# Altium PCB Copy of Main_Board.PcbDoc (part 3 of 4)
Units mil, origin at the board's own origin, x right, y up, seen from the top; angles counter-clockwise.
Board outline 5818.45 x 4760.12 mil, 4 copper layers (Top Layer, POWER, GROUND, Bottom Layer), stack 30.634 mil thick; 298 components, 323 nets, 1386 pads, 599 vias.
Unrouted connection lines stored in the file: 1.
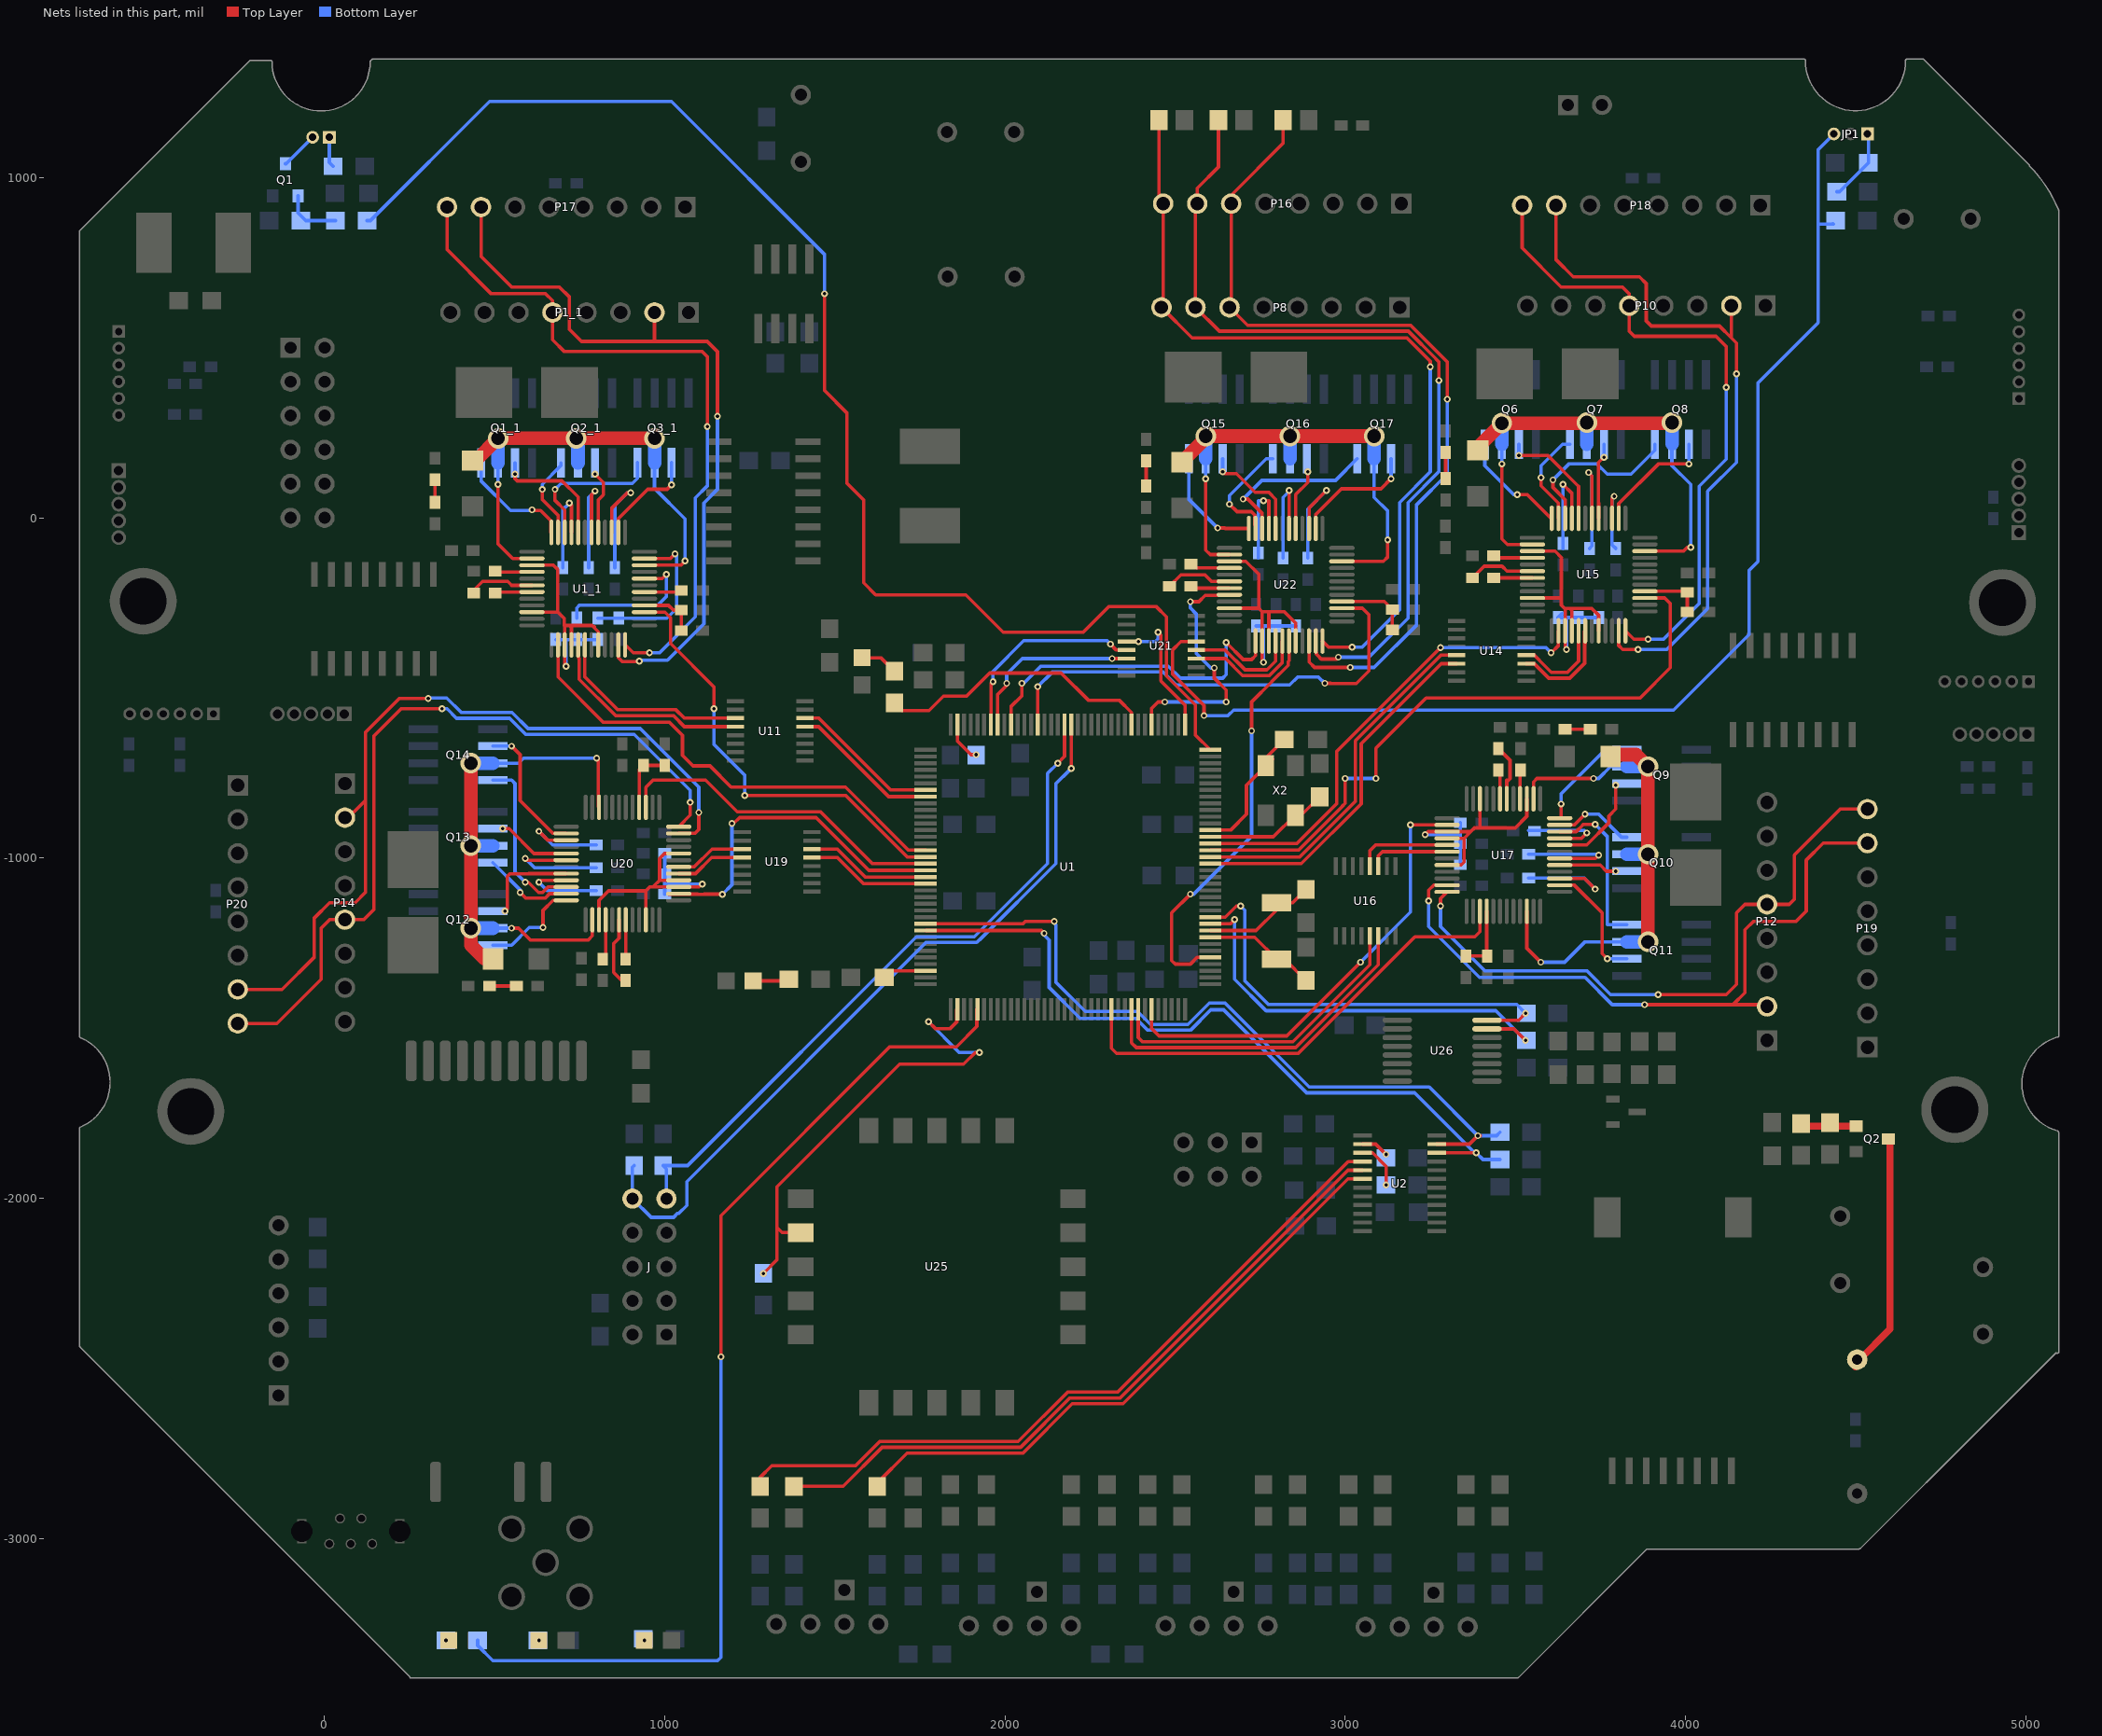
[diagram p5: the nets of this part, all layers, seen from the top]

## Via types
v1: diameter 20, hole 10, Top Layer to Bottom Layer, 507 vias
v2: diameter 25, hole 12, Top Layer to Bottom Layer, 48 vias
v3: diameter 60, hole 40, Top Layer to Bottom Layer, 40 vias
v4: diameter 30, hole 16, Top Layer to Bottom Layer, 3 vias
v5: diameter 32, hole 16, Top Layer to Bottom Layer, 1 vias

## Nets (pads, with @x,y where several pads share a name; then routed paths per layer and width w, separated by ;. In a path a pad name is that pad's centre, name@x,y a point inside that pad or via, vN(x,y) a via of type N, cw(c..) or ccw(c..) an arc to the next point about the centre after c; other vN are vias at no path point) (continued)
H1_d: P8.6 P16.6 R88.2 U22.10 | length 2564.1
  Top Layer w10: R88.2@2817.59,1168.62 2817.59,1101.22 2664.99,948.62 P16.6@2664.99,923.62 2664.99,613.62 2712.99,565.62 3192.58,565.62 3299.99,458.2 v1(3299.99,348.62) ; U22.10@2893.89,-362.13 2893.89,-423.78 2909.99,-439.88 v1(3014.99,-439.88)
  Bottom Layer w10: v1(3014.99,-439.88) 3084.99,-439.88 3209.99,-314.88 3209.99,38.62 3299.99,128.62 v1(3299.99,348.62)
H2_1: P1_1.2 P17.7 U1_1.11 | length 2255.5
  Top Layer w10: P17.7@459.99,913.62 459.99,768.62 549.99,678.62 689.99,678.62 719.99,648.62 719.99,553.62 754.99,518.62 974.99,518.62 ; U1_1.11@863.57,-373.63 863.57,-411.38 875.22,-423.03 923.35,-423.03 v1(924.99,-421.38) ; P1_1.2@969.99,603.62 969.99,523.62 974.99,518.62 ; v1(1154.99,298.62) 1154.99,488.62 1124.99,518.62 974.99,518.62
  Bottom Layer w10: v1(924.99,-421.38) 927.99,-418.38 1007.99,-418.38 1114.99,-311.38 1114.99,43.62 1154.99,83.62 v1(1154.99,298.62)
H2_2: P10.2 P18.7 U15.11 | length 2125.5
  Top Layer w10: P18.7@3619.99,918.62 3619.99,758.62 3669.99,708.62 3864.99,708.62 3884.99,688.62 3884.99,578.62 3899.99,563.62 4099.99,563.62 4134.99,528.62 ; U15.11@3804.05,-332.21 3804.05,-375.44 3815.46,-386.85 v1(3860.46,-386.85) ; P10.2@4134.99,623.62 4134.99,528.62 ; v1(4149.99,423.62) 4149.99,513.62 4134.99,528.62
  Bottom Layer w10: v1(3860.46,-386.85) 3945.46,-386.85 4065.46,-266.85 4065.46,78.15 4149.99,162.67 v1(4149.99,423.62)
H2_3: P12.2 P19.7 U17.11 | length 2047.6
  Top Layer w10: v1(3244.99,-1126.38) 3244.99,-1094.97 3259.99,-1079.97 U17.11@3299.64,-1079.97 ; v1(3879.99,-1431.38) 4139.99,-1431.38 ; P12.2@4239.99,-1436.38 4234.99,-1431.38 4139.99,-1431.38 ; P19.7@4534.99,-956.38 4404.99,-956.38 4354.99,-1006.38 4354.99,-1156.38 4324.99,-1186.38 4199.99,-1186.38 4174.99,-1211.38 4174.99,-1396.38 4139.99,-1431.38
  Bottom Layer w10: v1(3244.99,-1126.38) 3244.99,-1201.38 3394.99,-1351.38 3704.99,-1351.38 3784.99,-1431.38 v1(3879.99,-1431.38)
H2_4: P14.2 P20.7 U20.11 | length 2430.6
  Top Layer w10: P20.7@-255.01,-1386.38 -125.01,-1386.38 -30.01,-1291.38 -30.01,-1176.38 14.99,-1131.38 89.99,-1131.38 119.99,-1101.38 119.99,-831.38 ; P14.2@59.99,-881.38 69.99,-871.38 79.99,-871.38 119.99,-831.38 ; v1(304.99,-531.38) 219.99,-531.38 119.99,-631.38 119.99,-831.38 ; U20.11@1040.98,-927.8 1088.57,-927.8 1099.99,-916.38 v1(1099.99,-866.38)
  Bottom Layer w10: v1(304.99,-531.38) 306.99,-529.38 359.1,-529.38 402.1,-572.38 551.15,-572.38 598.15,-619.38 927.99,-619.38 1099.99,-791.38 v1(1099.99,-866.38)
H2_d: P8.7 P16.7 R87.2 U22.11 | length 2515.3
  Top Layer w10: R87.2@2627.59,1168.62 2627.59,1031.22 2564.99,968.62 P16.7@2564.99,923.62 2559.99,918.62 P8.7@2559.99,618.62 2629.99,548.62 3185.53,548.62 3266.99,467.16 3266.99,466.62 3274.99,458.62 v1(3274.99,403.62) ; U22.11@2913.57,-362.13 2913.57,-394.88 2915.35,-396.66 2915.35,-401.04 2920.68,-406.36 2929.47,-415.15 2974.72,-415.15 v1(2979.99,-409.88)
  Bottom Layer w10: v1(2979.99,-409.88) 3069.99,-409.88 3184.99,-294.88 3184.99,45.12 3274.99,135.12 v1(3274.99,403.62)
H3_1: P1_1.5 P17.8 U1_1.12 | length 2127
  Top Layer w10: P17.8@359.99,913.62 359.99,788.62 489.99,658.62 649.99,658.62 669.99,638.62 P1_1.5@669.99,603.62 669.99,523.62 704.99,488.62 1109.99,488.62 1124.99,473.62 v1(1124.99,268.62) ; U1_1.12@883.26,-373.63 884.4,-373.63 907.16,-396.38 v1(954.99,-396.38)
  Bottom Layer w10: v1(954.99,-396.38) 984.99,-396.38 1089.99,-291.38 1089.99,58.62 1124.99,93.62 v1(1124.99,268.62)
H3_2: P10.5 P18.8 U15.12 | length 1968.4
  Top Layer w10: P18.8@3519.99,918.62 3519.99,793.62 3634.99,678.62 3814.99,678.62 3834.99,658.62 P10.5@3834.99,623.62 3834.99,548.62 3849.99,533.62 4089.99,533.62 4119.99,503.62 v1(4119.99,383.62) ; U15.12@3823.73,-332.21 3824.09,-332.21 3848.73,-356.85 v1(3890.46,-356.85)
  Bottom Layer w10: v1(3890.46,-356.85) 3935.46,-356.85 4040.46,-251.85 4040.46,93.15 4119.99,172.67 v1(4119.99,383.62)
H3_3: P12.5 P19.8 U17.12 | length 1872.6
  Top Layer w10: v1(3279.99,-1141.38) 3279.99,-1119.3 U17.12@3299.64,-1099.65 ; v1(3919.99,-1401.38) 4119.99,-1401.38 4149.99,-1371.38 4149.99,-1161.38 4174.99,-1136.38 P12.5@4239.99,-1136.38 4304.99,-1136.38 4319.99,-1121.38 4319.99,-991.38 4454.99,-856.38 P19.8@4534.99,-856.38
  Bottom Layer w10: v1(3279.99,-1141.38) 3279.99,-1201.38 3409.99,-1331.38 3709.99,-1331.38 3779.99,-1401.38 v1(3919.99,-1401.38)
H3_4: P14.5 P20.8 U20.12 | length 2320
  Top Layer w10: P20.8@-255.01,-1486.38 -140.01,-1486.38 -10.01,-1356.38 -10.01,-1206.38 14.99,-1181.38 P14.5@59.99,-1181.38 114.99,-1181.38 144.99,-1151.38 144.99,-641.38 224.99,-561.38 v1(344.99,-561.38) ; U20.12@1040.98,-908.11 1074.99,-874.1 v1(1074.99,-836.38)
  Bottom Layer w10: v1(344.99,-561.38) 359.99,-561.38 387.99,-589.38 544.1,-589.38 591.1,-636.38 909.99,-636.38 1074.99,-801.38 v1(1074.99,-836.38)
H3_d: P8.8 P16.8 R86.2 U22.12 | length 2460.4
  Top Layer w10: R86.2@2452.59,1168.62 2452.59,936.02 P16.8@2464.99,923.62 2464.99,623.62 P8.8@2459.99,618.62 2549.99,528.62 3181.49,528.62 3249.99,460.12 v1(3249.99,443.62) ; U22.12@2933.26,-362.13 2949.99,-378.86 2949.99,-379.88 v1(3019.99,-379.88)
  Bottom Layer w10: v1(3019.99,-379.88) 3049.99,-379.88 3159.99,-269.88 3159.99,45.12 3249.99,135.12 v1(3249.99,443.62)
HEART: R34.1 U1.113 | length 3086.6
  Top Layer w10: v1(1164.99,-2466.38) 1164.99,-2051.38 1660.99,-1555.38 1857.29,-1555.38 1917.46,-1495.21 1917.46,-1444.69 U1.113@1919.24,-1444.69
  Bottom Layer w10: R34.1@449.99,-3300.08 449.99,-3315.08 494.99,-3360.08 1154.99,-3360.08 1164.99,-3350.08 v1(1164.99,-2466.38)
I2C_SCL_2: R49.1 U1.11 U26.16 | length 1313.9
  Top Layer w10: U1.11@2603.3,-1174.02 2647.35,-1174.02 2679.99,-1141.38 v1(2692.63,-1141.38) ; U26.16@3416.88,-1476.82 3509.56,-1476.82 v1(3529.99,-1456.38)
  Bottom Layer w10: v1(2692.63,-1141.38) 2704.99,-1153.74 2704.99,-1361.38 2773.99,-1430.38 3503.99,-1430.38 v1(3529.99,-1456.38)
I2C_SCL_3: R41.1 U1.100 U2.22 | length 2224.4
  Top Layer w10: U1.100@1766.68,-1213.39 2106.54,-1213.39 2114.54,-1221.38 v1(2114.99,-1221.38) ; U2.22@3268.99,-1866.82 3269.43,-1866.38 v1(3384.99,-1866.38)
  Bottom Layer w10: v1(2114.99,-1221.38) 2109.99,-1221.38 2129.99,-1241.38 2129.99,-1380.42 2220.95,-1471.38 2384.99,-1471.38 2419.99,-1506.38 2544.99,-1506.38 2604.99,-1446.38 2642.87,-1446.38 2886.87,-1690.38 3203.99,-1690.38 3379.99,-1866.38 v1(3384.99,-1866.38) 3404.99,-1886.38 R41.1@3454.99,-1886.38
I2C_SCL_4: J.10 R91.1 U1.54 | length 2258.6
  Top Layer w10: v1(2194.83,-736.54) U1.54@2194.83,-608.08
  Bottom Layer w10: R91.1@909.99,-1904.38 904.99,-1909.38 J.10@904.99,-2001.38 959.99,-2056.38 1025.95,-2056.38 1037.95,-2044.38 1041.99,-2044.38 1064.99,-2021.38 1064.99,-1951.38 1767.99,-1248.38 1917.03,-1248.38 1926.24,-1239.17 1926.99,-1239.17 2149.99,-1016.17 2149.99,-781.38 v1@2189.99,-741.38
I2C_SDA_2: R48.1 U1.10 U26.15 | length 1308.5
  Top Layer w10: U1.10@2603.3,-1193.7 2662.67,-1193.7 v1(2674.99,-1181.38) ; U26.15@3416.88,-1502.41 3496.02,-1502.41 v1(3529.99,-1536.38)
  Bottom Layer w10: v1(2674.99,-1181.38) 2674.99,-1356.38 2767.67,-1449.06 3442.67,-1449.06 v1(3529.99,-1536.38)
I2C_SDA_3: R40.1 U1.99 U2.23 | length 2255.9
  Top Layer w10: U1.99@1766.68,-1193.7 2052.67,-1193.7 2059.99,-1186.38 v1(2144.99,-1186.38) ; U2.23@3268.99,-1841.22 3365.15,-1841.22 v1(3389.99,-1816.38) v1@3396.99,-1816.38
  Bottom Layer w10: v1(2144.99,-1186.38) 2139.99,-1186.38 2149.99,-1196.38 2149.99,-1365.42 2235.95,-1451.38 2389.99,-1451.38 2427.99,-1489.38 2537.95,-1489.38 2600.95,-1426.38 2646.91,-1426.38 2893.91,-1673.38 3246.99,-1673.38 v1(3389.99,-1816.38) 3444.99,-1816.38 R40.1@3454.99,-1806.38
I2C_SDA_4: J.9 R92.2 U1.55 | length 2028
  Top Layer w10: v1(2154.99,-721.38) 2175.15,-701.22 U1.55@2175.15,-608.08
  Bottom Layer w10: J.9@1004.99,-2001.38 1004.99,-1914.38 R92.2@994.99,-1904.38 1066.99,-1904.38 1739.99,-1231.38 1909.99,-1231.38 2124.99,-1016.38 2124.99,-751.38 v1(2154.99,-721.38)
IMU_NRST: R119.1 U1.110 U25.2 | length 1431.5
  Top Layer w10: v1(1289.99,-2221.38) 1329.99,-2181.38 1329.99,-2086.38 ; U25.2@1399.99,-2101.38 1344.99,-2101.38 1329.99,-2086.38 ; v1(1774.99,-1481.38) 1794.99,-1501.38 1839.17,-1501.38 1858.41,-1482.14 1858.41,-1446.47 U1.110@1860.19,-1444.69 ; v1(1924.99,-1571.38) 1913.42,-1571.38 1878.42,-1606.38 1689.99,-1606.38 1329.99,-1966.38 1329.99,-2086.38
  Bottom Layer w10: v1(1774.99,-1481.38) 1864.99,-1571.38 v1(1924.99,-1571.38)
Infra: R2.1 U1.36 | length 4126.2
  Top Layer w10: v1(1469.99,658.62) 1469.99,373.62 1534.99,308.62 1534.99,102.66 1584.99,52.66 1584.99,-191.38 1619.99,-226.38 1884.99,-226.38 1994.99,-336.38 2229.99,-336.38 2304.99,-261.38 2444.99,-261.38 2474.99,-291.38 2474.99,-465.42 2559.99,-550.42 2559.99,-638.59 U1.36@2603.3,-681.89
  Bottom Layer w10: R2.1@124.99,873.62 134.99,873.62 484.99,1223.62 1019.99,1223.62 1469.99,773.62 v1(1469.99,658.62)
Infra_IN: JP1.3 R1.2 U21.5 | length 3634.7
  Top Layer w10: U21.5@2562.49,-363.88 2517.49,-363.88 2491.99,-389.38 2491.99,-458.38 2584.99,-551.38 v1(2584.99,-581.38)
  Bottom Layer w10: v1(2584.99,-581.38) 2655.95,-581.38 2671.95,-565.38 3965.03,-565.38 4186.99,-343.42 4186.99,-154.38 4212.99,-128.38 4212.99,396.62 4389.99,573.62 4389.99,863.62 ; R1.2@4433.49,865.12 4434.99,863.62 4389.99,863.62 ; JP1.3@4436.57,1128.62 4389.99,1082.04 4389.99,863.62
Infra_IN_V: U1.37 U21.12 | length 422.9
  Top Layer w10: U21.12@2357.49,-363.88 v1(2392.49,-363.88) v1@2394.37,-365.76 ; v1(2449.99,-336.38) 2457.99,-344.38 2457.99,-479.38 2529.48,-550.87 U1.37@2529.48,-608.08
  Bottom Layer w10: v1(2392.49,-363.88) 2442.49,-363.88 2449.99,-356.38 v1(2449.99,-336.38)
Infra_LED: R90.1 U1.45 | length 835.4
  Top Layer w10: R90.1@1674.99,-544.38 1696.99,-566.38 1776.91,-566.38 1818.91,-524.38 1886.99,-524.38 1954.99,-456.38 2164.99,-456.38 2244.72,-536.11 2335.71,-536.11 2372,-572.4 U1.45@2372,-608.08
IR+: JP2.1 R5.1 | length 89.5
  Bottom Layer w10: JP2.1@14.2,1118.62 14.2,1044.41 R5.1@24.99,1033.62
IR-: JP2.2 Q1.3 | length 112.2
  Bottom Layer w10: Q1.3@-115.01,1040.86 -112.76,1040.86 JP2.2@-35.01,1118.62
Motor_DIRO_d: U1.42 U22.44 | length 741.9
  Top Layer w10: U1.42@2431.06,-608.08 2431.06,-560.32 2449.99,-541.38 v1(2469.99,-541.38) ; v1(2544.99,-246.38) 2569.99,-246.38 2588.3,-228.08 2657.86,-228.08 U22.44@2659.64,-226.3 ; v1(2614.99,-441.38) 2614.99,-471.38 2649.99,-506.38 v1(2649.99,-541.38)
  Bottom Layer w10: v1(2469.99,-541.38) v1(2649.99,-541.38) ; v1(2544.99,-246.38) 2544.99,-265.27 2561.99,-282.27 2561.99,-398.38 2604.99,-441.38 v1(2614.99,-441.38)
Motor_FF1_1: U1_1.6 U11.3 | length 586.5
  Top Layer w10: U1_1.6@765.15,-373.63 765.15,-467.5 862.03,-564.38 1032.99,-564.38 1057.49,-588.88 U11.3@1207.49,-588.88
Motor_FF1_1_V: U1.79 U11.14 | length 441.6
  Top Layer w10: U11.14@1412.49,-588.88 1452.49,-588.88 1663.61,-800 U1.79@1766.68,-800
Motor_FF1_2: U14.3 U15.6 | length 340.3
  Top Layer w10: U14.3@3532.49,-428.88 3555.96,-428.88 3598.46,-471.38 3659.99,-471.38 3703.84,-427.53 3703.84,-333.99 U15.6@3705.62,-332.21 U15.6@3705.62,-369.34
Motor_FF1_2_V: U1.19 U14.14 | length 1070.9
  Top Layer w10: U1.19@2603.3,-1016.54 2871.08,-1016.54 3046.99,-840.63 3046.99,-664.38 3282.49,-428.88 U14.14@3327.49,-428.88
Motor_FF1_3: U16.3 U17.6 | length 237.3
  Top Layer w10: U16.3@3097.49,-1023.88 3097.49,-993.88 3109.83,-981.54 U17.6@3299.64,-981.54
Motor_FF1_3_V: U1.136 U16.14 | length 1015.8
  Top Layer w10: U1.136@2372,-1444.69 2372,-1543.39 2385.99,-1557.38 2588.19,-1557.38 2588.4,-1557.17 2854.2,-1557.17 3097.49,-1313.88 U16.14@3097.49,-1228.88
Motor_FF1_4: U19.3 U20.6 | length 213.3
  Top Layer w10: U20.6@1040.98,-1026.22 1086.26,-1026.22 1138.9,-973.59 1212.77,-973.59 U19.3@1232.45,-973.59
Motor_FF1_4_V: U1.92 U19.14 | length 368.2
  Top Layer w10: U19.14@1432.49,-973.88 1507.49,-973.88 1589.52,-1055.91 U1.92@1766.68,-1055.91
Motor_FF1_d: U21.3 U22.6 | length 353.2
  Top Layer w10: U21.3@2562.49,-413.88 2648.45,-413.88 2698.45,-463.88 2777.01,-463.88 2814.51,-426.38 2815.15,-426.38 U22.6@2815.15,-362.13
Motor_FF1_d_V: U1.65 U21.14 | length 530.9
  Top Layer w10: U1.65@1978.3,-608.08 1978.3,-519.36 2004.99,-492.67 v1(2004.99,-486.38) ; v1(2314.99,-413.88) U21.14@2357.49,-413.88
  Bottom Layer w10: v1(2004.99,-486.38) 2004.99,-459.69 2050.8,-413.88 v1(2314.99,-413.88)
Motor_FF2_1: U1_1.5 U11.4 | length 619.1
  Top Layer w10: U1_1.5@745.46,-373.63 747.24,-375.41 747.24,-412.54 748.15,-413.44 748.15,-474.54 854.99,-581.38 1024.99,-581.38 1057.49,-613.88 U11.4@1207.49,-613.88
Motor_FF2_1_V: U1.80 U11.13 | length 439.4
  Top Layer w10: U11.13@1412.49,-613.88 1452.49,-613.88 1658.3,-819.69 U1.80@1766.68,-819.69
Motor_FF2_2: U14.4 U15.5 | length 277.8
  Top Layer w10: U14.4@3532.49,-403.88 3555.96,-403.88 3569.99,-417.91 3569.99,-418.87 3605.5,-454.38 3652.95,-454.38 3685.94,-421.4 U15.5@3685.94,-332.21
Motor_FF2_2_V: U1.20 U14.13 | length 1074.2
  Top Layer w10: U1.20@2603.3,-996.85 2866.72,-996.85 3029.99,-833.59 3029.99,-655.42 3281.53,-403.88 U14.13@3327.49,-403.88
Motor_FF2_3: U16.4 U17.5 | length 279.2
  Top Layer w10: U16.4@3072.49,-1023.88 3072.49,-978.88 3089.52,-961.85 U17.5@3299.64,-961.85
Motor_FF2_3_V: U1.137 U16.13 | length 947.9
  Top Layer w10: U1.137@2391.68,-1444.69 2391.68,-1528.08 2403.78,-1540.17 2846.2,-1540.17 3072.49,-1313.88 U16.13@3072.49,-1228.88
Motor_FF2_4: U19.4 U20.5 | length 211
  Top Layer w10: U20.5@1040.98,-1045.91 1090.62,-1045.91 1137.74,-998.78 1212.77,-998.78 U19.4@1232.45,-998.78
Motor_FF2_4_V: U1.93 U19.13 | length 366
  Top Layer w10: U19.13@1432.49,-998.88 1507.49,-998.88 1584.2,-1075.59 U1.93@1766.68,-1075.59
Motor_FF2_d: U21.4 U22.5 | length 326.8
  Top Layer w10: U21.4@2562.49,-388.88 2647.49,-388.88 2705.49,-446.88 2769.1,-446.88 2769.6,-446.38 2770.46,-446.38 2795.46,-421.38 U22.5@2795.46,-362.13
Motor_FF2_d_V: U1.66 U21.13 | length 600.5
  Top Layer w10: U1.66@1958.61,-608.08 1958.61,-487.76 v1(1964.99,-481.38) ; v1(2309.99,-371.38) 2327.49,-388.88 U21.13@2357.49,-388.88
  Bottom Layer w10: v1(1964.99,-481.38) 1964.99,-451.38 2054.99,-361.38 2299.99,-361.38 v1(2309.99,-371.38)
Motor_MODE_1: U1.89 U1_1.15 | length 1302.8
  Top Layer w10: U1_1.15@940.35,-277.17 1000.31,-277.17 ; 999.99,-277.48 1000.31,-277.48 1016.99,-294.17 1016.99,-369.34 1144.99,-497.34 v1(1144.99,-561.38) ; v1(1234.99,-816.38) 1531.91,-816.38 1712.38,-996.85 U1.89@1766.68,-996.85
  Bottom Layer w10: v1(1144.99,-561.38) 1144.99,-666.38 1234.99,-756.38 v1(1234.99,-816.38)
Motor_MODE_2: U1.21 U15.15 | length 1939.5
  Top Layer w10: U1.21@2603.3,-977.17 2862.37,-977.17 2991.99,-847.54 2991.99,-847.26 2999.99,-839.26 v1(2999.99,-766.38) ; v1(3089.99,-766.38) 3089.99,-677.34 3237.95,-529.38 3866.99,-529.38 3955.46,-440.91 3955.46,-251.85 3939.68,-236.07 3939.36,-236.07 ; U15.15@3880.82,-235.75 3939.36,-235.75
  Bottom Layer w10: v1(2999.99,-766.38) v1(3089.99,-766.38)
Motor_MODE_3: U1.133 U17.15 | length 1412
  Top Layer w10: U1.133@2312.94,-1444.69 2312.94,-1559.33 2327.99,-1574.38 2595.23,-1574.38 2595.44,-1574.17 2862.2,-1574.17 3204.99,-1231.38 3381.09,-1231.38 3396.09,-1216.38 U17.15@3396.09,-1156.74
Motor_MODE_4: U1.90 U20.15 | length 991
  Top Layer w10: U20.15@944.52,-851.03 944.52,-792.48 965.62,-771.38 1119.99,-771.38 1212.99,-864.38 1457.99,-864.38 1610.15,-1016.54 U1.90@1766.68,-1016.54
Motor_MODE_d: U1.59 U22.15 | length 1403.9
  Top Layer w10: U1.59@2096.41,-608.08 v1(2096.41,-496.38) ; v1(2939.99,-486.38) 2956.49,-486.38 2956.99,-486.88 3032.99,-486.88 3069.99,-449.88 3069.99,-284.88 3050.78,-265.67 U22.15@2990.35,-265.67
  Bottom Layer w10: v1(2096.41,-496.38) 2139.41,-453.38 2464.99,-453.38 2502.99,-491.38 2836.99,-491.38 2859.99,-468.38 2921.99,-468.38 v1(2939.99,-486.38)
Motor_Reset_1: U1.88 U1_1.2 | length 1420
  Top Layer w10: U1_1.2@686.41,-373.63 686.41,-467.8 819.99,-601.38 1014.03,-601.38 1051.99,-639.34 1051.99,-698.38 1082.99,-729.38 1132.99,-729.38 1194.99,-791.38 1530.95,-791.38 1716.74,-977.17 U1.88@1766.68,-977.17
Motor_Reset_2: U1.22 U15.2 | length 1410.3
  Top Layer w10: U1.22@2603.3,-957.48 2858.01,-957.48 2974.99,-840.5 2974.99,-686.38 v1(3279.99,-381.38) ; v1@3605.46,-396.85 3626.88,-375.44 U15.2@3626.88,-332.21
  Bottom Layer w10: v1(3279.99,-381.38) 3589.99,-381.38 v1(3604.99,-396.38)
Motor_Reset_3: U1.139 U17.2 | length 1342.4
  Top Layer w10: U1.139@2431.06,-1444.69 2431.06,-1501.38 2452.84,-1523.17 2828.2,-1523.17 v1(3044.99,-1306.38) ; v1(3191.41,-902.8) U17.2@3299.64,-902.8
  Bottom Layer w10: v1(3044.99,-1306.38) 3191.99,-1159.38 3191.99,-903.38 v1(3191.41,-902.8)
Motor_Reset_4: U1.91 U20.2 | length 1020.6
  Top Layer w10: U20.2@1010.98,-1104.97 1012.39,-1106.38 1096.08,-1106.38 1096.98,-1107.28 1115.21,-1107.28 1116.1,-1106.38 1168.2,-1106.38 v1(1169.09,-1107.28) ; v1(1197.49,-898.88) 1202.49,-898.88 1219.99,-881.38 1444.99,-881.38 1599.83,-1036.22 U1.91@1766.68,-1036.22
  Bottom Layer w10: v1(1169.09,-1107.28) 1197.49,-1078.88 v1(1197.49,-898.88)
Motor_Reset_d: U1.63 U22.2 | length 1034.1
  Top Layer w10: U1.63@2017.67,-608.08 2017.67,-554.82 2049.99,-522.49 v1(2049.99,-486.38) ; v1(2649.99,-366.38) 2699.99,-416.38 2724.99,-416.38 2736.41,-404.97 U22.2@2736.41,-362.13 U22.2@2736.41,-352.13
  Bottom Layer w10: v1(2049.99,-486.38) 2054.99,-486.38 2104.99,-436.38 2479.99,-436.38 2514.99,-471.38 2639.99,-471.38 2649.99,-461.38 v1(2649.99,-366.38)
Motor_TACHO_d: U1.5 U22.7 | length 1218.7
  Top Layer w10: v1(2544.99,-1106.38) 2489.99,-1161.38 2489.99,-1301.38 2500.42,-1311.82 2544.99,-1311.82 2564.68,-1292.13 U1.5@2603.3,-1292.13 ; v1(2724.99,-626.38) 2724.99,-541.38 2784.69,-481.68 2784.69,-480.88 2832.15,-433.42 2832.15,-422.41 2834.83,-419.72 U22.7@2834.83,-362.13
  Bottom Layer w10: v1(2544.99,-1106.38) 2554.99,-1106.38 2724.99,-936.38 v1(2724.99,-626.38) v1@2724.99,-621.38
NetC1_1: C1.1 JP1.1 R4.1 | length 214.5
  Bottom Layer w10: R4.1@4444.99,958.62 4452.99,958.62 C1.1@4537.99,1043.62 4537.99,1125.62 JP1.1@4534.99,1128.62
NetC1_1_2: C1_1.2 U1_1.40 | length 109.3
  Top Layer w10: C1_1.2@501.49,-156.38 504.17,-159.06 U1_1.40@609.64,-159.06
NetC2_1_2: C2_1.2 R2_1.2 R4_1.2 U1_1.3 U1_1.4 U1_1.8 U1_1.39 U1_1.46 | length 863.1
  Top Layer w10: U1_1.46@609.64,-277.17 685.78,-277.17 ; U1_1.39@609.64,-139.37 672.98,-139.37 685.78,-152.17 685.78,-277.17 ; v1(709.99,-436.38) 706.09,-432.48 U1_1.3@706.09,-373.63 706.09,-317.48 704.99,-316.38 ; U1_1.4@725.78,-373.63 725.78,-322.17 719.99,-316.38 ; 793.49,-319.88 789.69,-319.88 ; U1_1.8@804.52,-373.63 804.52,-334.72 789.69,-319.88 ; 685.78,-277.17 704.99,-296.38 704.99,-316.38 ; 704.99,-316.38 719.99,-316.38 ; 719.99,-316.38 786.19,-316.38 789.69,-319.88
  Bottom Layer w10: C2_1.2@679.99,-357.88 709.99,-357.88 ; v1(709.99,-436.38) 709.99,-357.88 ; R4_1.2@803.33,-357.88 R2_1.2@741.66,-357.88 709.99,-357.88
NetC3_1_2: C3_1.2 R1_1.2 U1_1.16 | length 173.9
  Top Layer w10: U1_1.16@940.35,-257.48 1011.09,-257.48 1024.99,-271.38 R1_1.2@1048.49,-271.38 C3_1.2@1048.49,-331.38
NetC5_1_1: C5_1.1 U1_1.43 | length 109.5
  Top Layer w10: C5_1.1@501.49,-221.38 504.76,-218.11 U1_1.43@609.64,-218.11
NetC5_1_2: C5_1.2 U1_1.42 | length 195.1
  Top Layer w10: C5_1.2@438.49,-221.38 438.49,-212.88 464.49,-186.88 538.44,-186.88 549.68,-198.11 549.99,-198.11 ; 549.99,-198.43 U1_1.42@609.64,-198.43
NetC6_1_2: C6_1.2 U1_1.33 | length 287.6
  Top Layer w10: v1(719.99,43.62) 725.78,37.83 U1_1.33@725.78,-42.92
  Bottom Layer w10: C6_1.2@699.99,-146.77 699.99,23.62 v1(719.99,43.62)
NetC7_1_2: C7_1.2 U1_1.30 | length 358.8
  Top Layer w10: U1_1.30@784.83,-42.92 784.83,68.46 v1(794.99,78.62)
  Bottom Layer w10: C7_1.2@776.57,-146.77 776.57,60.2 v1(794.99,78.62)
NetC8_1_2: C8_1.2 U1_1.27 | length 391.3
  Top Layer w10: U1_1.27@843.89,-42.92 843.89,27.52 889.99,73.62 v1(899.99,73.62)
  Bottom Layer w10: C8_1.2@853.15,-146.77 853.15,36.78 889.99,73.62 v1(899.99,73.62)
NetC11_2: C11.2 U1.106 | length 131.7
  Top Layer w10: C11.2@1634.99,-1331.5 U1.106@1766.68,-1331.5
NetC12_2: C12.2 U1.71 | length 119.8
  Top Layer w10: U1.71@1860.19,-608.08 1860.19,-656.58 1899.99,-696.38 v1(1914.99,-696.38)
NetC46_2: C46.2 U15.40 | length 115.5
  Top Layer w10: C46.2@3436.96,-111.85 3442.75,-117.64 U15.40@3550.11,-117.64
NetC47_2: C47.2 R63.2 R65.2 U15.3 U15.4 U15.8 U15.39 U15.46 | length 914.2
  Top Layer w10: U15.46@3550.11,-235.75 3635.46,-235.75 ; U15.39@3550.11,-97.96 3616.57,-97.96 3635.46,-116.85 3635.46,-235.75 ; v1(3650.46,-386.85) 3646.57,-382.96 U15.3@3646.57,-332.21 3646.57,-267.96 3645.46,-266.85 ; U15.4@3666.25,-332.21 3666.25,-272.64 3660.46,-266.85 ; U15.8@3744.99,-332.21 3744.99,-286.38 3725.46,-266.85 3660.46,-266.85 ; 3635.46,-235.75 3635.46,-256.85 3645.46,-266.85 ; 3645.46,-266.85 3660.46,-266.85
  Bottom Layer w10: 3645.46,-281.85 3636.96,-281.85 C47.2@3625.46,-293.35 3650.46,-293.35 ; v1(3650.46,-386.85) 3650.46,-293.35 ; R65.2@3745.46,-293.35 R63.2@3685.46,-293.35 3650.46,-293.35
NetC48_2: C48.2 R62.2 U15.16 | length 183.5
  Top Layer w10: U15.16@3880.82,-216.07 4002.18,-216.07 R62.2@4005.46,-219.35 C48.2@4005.46,-276.85
NetC49_1: C49.1 U15.43 | length 113.2
  Top Layer w10: C49.1@3436.96,-176.85 3437.12,-176.7 U15.43@3550.11,-176.7
NetC49_2: C49.2 U15.42 | length 196.5
  Top Layer w10: C49.2@3373.96,-176.85 3408.46,-142.35 3460.96,-142.35 3475.62,-157.01 U15.42@3550.11,-157.01
NetC50_2: C50.2 U15.33 | length 298.5
  Top Layer w10: v1(3640.46,98.15) 3665.46,73.15 ; U15.33@3666.25,-1.5 3666.25,73.15
  Bottom Layer w10: C50.2@3640.46,-90.35 v1(3640.46,98.15)
NetC51_2: C51.2 U15.30 | length 355.3
  Top Layer w10: v1@3720.46,128.15 3725.31,123.3 U15.30@3725.31,-1.5
  Bottom Layer w10: C51.2@3717.96,-90.35 3725.46,-82.85 3725.46,123.15 v1@3720.46,128.15
  other v1: 3715.46,133.15
NetC52_2: C52.2 U15.27 | length 227.8
  Top Layer w10: U15.27@3784.36,-1.5 3784.36,57.04 v1(3790.46,63.15)
  Bottom Layer w10: v1(3790.46,63.15) 3784.36,57.04 3784.36,-79.25 C52.2@3795.46,-90.35
NetC58_2: C58.2 U17.40 | length 114.9
  Top Layer w10: C58.2@3509.99,-741.38 3514.2,-745.59 U17.40@3514.2,-854.53
NetC59_2: C59.2 R69.2 R71.2 U17.3 U17.4 U17.8 U17.39 U17.46 | length 885.5
  Top Layer w10: v1(3234.99,-931.38) 3243.89,-922.48 U17.3@3299.64,-922.48 3368.89,-922.48 ; U17.8@3299.64,-1020.91 3340.46,-1020.91 3349.2,-1012.17 3349.2,-942.17 ; U17.4@3299.64,-942.17 3349.2,-942.17 ; U17.46@3396.09,-826.03 3396.09,-911.38 ; U17.39@3533.89,-826.03 3533.89,-877.48 3499.99,-911.38 3396.09,-911.38 ; 3349.2,-942.17 3368.89,-922.48 ; 3368.89,-922.48 3379.99,-911.38 3396.09,-911.38
  Bottom Layer w10: v1(3234.99,-931.38) 3338.49,-931.38 ; R71.2@3338.49,-1019.72 R69.2@3338.49,-958.05 3338.49,-931.38 ; C59.2@3338.49,-896.38 3338.49,-931.38
NetC60_2: C60.2 R68.2 U17.16 | length 191.4
  Top Layer w10: R68.2@3354.99,-1288.38 3414.07,-1288.38 3415.78,-1286.67 U17.16@3415.78,-1156.74
NetC61_1: C61.1 U17.43 | length 117.4
  Top Layer w10: C61.1@3444.99,-741.38 3455.15,-751.54 U17.43@3455.15,-854.53
NetC61_2: C61.2 U17.42 | length 194.3
  Top Layer w10: C61.2@3449.99,-678.38 3484.49,-712.88 3484.49,-766.6 3475.15,-775.94 U17.42@3475.15,-800.04 ; U17.42@3474.83,-826.03 3474.83,-771.54
NetC62_2: C62.2 U17.33 | length 260.3
  Top Layer w10: U17.33@3630.35,-942.17 3694.2,-942.17 v1(3709.99,-926.38)
  Bottom Layer w10: C62.2@3538.99,-918.88 3702.49,-918.88 v1(3709.99,-926.38)
NetC63_2: C63.2 U17.30 | length 325.8
  Top Layer w10: U17.30@3630.35,-1001.22 3735.15,-1001.22 v1(3744.99,-991.38)
  Bottom Layer w10: C63.2@3538.99,-988.88 3742.49,-988.88 v1(3744.99,-991.38)
NetC64_2: C64.2 U17.27 | length 327
  Top Layer w10: U17.27@3630.35,-1060.28 3703.89,-1060.28 v1(3734.99,-1091.38)
  Bottom Layer w10: C64.2@3538.99,-1058.88 3702.49,-1058.88 v1(3734.99,-1091.38)
NetC70_2: C70.2 U20.40 | length 119.3
  Top Layer w10: C70.2@817.49,-1297.38 826.41,-1288.47 U20.40@826.41,-1181.74
NetC71_2: C71.2 R75.2 R77.2 U20.3 U20.4 U20.8 U20.39 U20.46 | length 905.3
  Top Layer w10: U20.39@806.72,-1181.74 806.72,-1124.65 834.52,-1096.85 944.52,-1096.85 ; U20.46@944.52,-1181.74 944.52,-1096.85 ; U20.4@1040.98,-1065.59 984.99,-1065.59 ; U20.8@1040.98,-986.85 999.52,-986.85 984.99,-1001.38 984.99,-1065.59 ; v1(1109.99,-1076.38) 1101.09,-1085.28 U20.3@1040.98,-1085.28 965.31,-1085.28 ; 944.52,-1096.85 956.09,-1085.28 965.31,-1085.28 ; 965.31,-1085.28 984.99,-1065.59
  Bottom Layer w10: C71.2@999.99,-1106.38 999.99,-1076.38 ; R77.2@999.99,-986.38 R75.2@999.99,-1046.38 999.99,-1076.38 ; v1(1109.99,-1076.38) 999.99,-1076.38
NetC72_2: C72.2 R74.2 U20.16 | length 190.9
  Top Layer w10: U20.16@924.83,-851.03 924.83,-740.54 R74.2@937.49,-727.88 C72.2@999.99,-727.88
NetC73_1: C73.1 U20.43 | length 115.8
  Top Layer w10: C73.1@884.99,-1297.38 885.46,-1296.91 U20.43@885.46,-1181.74
NetC73_2: C73.2 U20.42 | length 206.1
  Top Layer w10: U20.42@865.78,-1181.74 865.78,-1235.59 849.99,-1251.38 849.99,-1336.38 873.99,-1360.38 C73.2@884.99,-1360.38
NetC74_2: C74.2 U20.33 | length 261.5
  Top Layer w10: v1(629.99,-1071.38) 635.78,-1065.59 U20.33@710.27,-1065.59
  Bottom Layer w10: v1(629.99,-1071.38) 654.99,-1096.38 C74.2@798.49,-1096.38
NetC75_2: C75.2 U20.30 | length 342.3
  Top Layer w10: v1(589.99,-1001.38) 595.15,-1006.54 U20.30@710.27,-1006.54
  Bottom Layer w10: v1(589.99,-1001.38) 617.49,-1028.88 C75.2@798.49,-1028.88
NetC76_2: C76.2 U20.27 | length 276.2
  Top Layer w10: v1(629.99,-921.38) 656.09,-947.48 U20.27@710.27,-947.48
  Bottom Layer w10: v1(629.99,-921.38) 669.99,-961.38 C76.2@798.49,-961.38
NetC82_2: C82.2 U22.40 | length 113.4
  Top Layer w10: C82.2@2551.49,-134.88 2564.17,-147.56 U22.40@2659.64,-147.56
NetC83_2: C83.2 R81.2 R83.2 U22.3 U22.4 U22.8 U22.39 U22.46 | length 928.2
  Top Layer w10: U22.46@2659.64,-265.67 2745.78,-265.67 ; U22.39@2659.64,-127.87 2707.98,-127.87 2745.78,-165.67 2745.78,-265.67 ; v1(2759.99,-424.88) 2756.09,-420.98 U22.3@2756.09,-362.13 2756.09,-275.98 ; U22.4@2775.78,-362.13 2775.78,-276.77 2774.99,-275.98 ; U22.8@2854.52,-362.13 2854.52,-309.41 2821.09,-275.98 2774.99,-275.98 ; 2745.78,-265.67 2756.09,-275.98 ; 2756.09,-275.98 2774.99,-275.98
  Bottom Layer w10: C83.2@2738.33,-317.88 2759.99,-317.88 ; v1(2759.99,-424.88) 2759.99,-317.88 ; R83.2@2854.99,-317.88 R81.2@2796.66,-317.88 2759.99,-317.88
NetC84_2: C84.2 R80.2 U22.16 | length 218
  Top Layer w10: U22.16@2990.35,-245.98 3114.59,-245.98 R80.2@3138.49,-269.88 C84.2@3138.49,-329.88
NetC86_1: C86.1 U22.43 | length 125.4
  Top Layer w10: C86.1@2534.99,-204.88 2536.72,-206.61 U22.43@2659.64,-206.61
NetC86_2: C86.2 U22.42 | length 198.2
  Top Layer w10: C86.2@2483.49,-201.38 2517.31,-167.56 2587.67,-167.56 2607.04,-186.93 U22.42@2659.64,-186.93
NetC87_2: C87.2 U22.33 | length 280.2
  Top Layer w10: v1(2759.99,50.12) 2774.99,50.12 2775.46,49.65 2775.46,40.12 ; U22.33@2775.78,-31.42 2775.78,40.12
  Bottom Layer w10: C87.2@2744.99,-118.38 2744.99,50.12 v1(2759.99,50.12)
NetC88_2: C88.2 U22.30 | length 317.3
  Top Layer w10: U22.30@2834.83,-31.42 2834.99,-31.26 v1(2834.99,80.12)
  Bottom Layer w10: C88.2@2817.49,-118.38 2817.49,60.12 2834.99,77.62 v1(2834.99,80.12)
NetC89_2: C89.2 U22.27 | length 354
  Top Layer w10: U22.27@2893.89,-31.42 2893.89,29.02 v1(2944.99,80.12)
  Bottom Layer w10: C89.2@2889.99,-118.38 2889.99,25.12 v1(2944.99,80.12)
NetC95_1: C95.1 U1.8 X1.2 | length 334.4
  Top Layer w10: U1.8@2603.3,-1233.07 2734.01,-1233.07 X1.2@2798.07,-1297.14 2821.75,-1297.14 C95.1@2884.99,-1360.38
NetC96_1: C96.1 U1.9 X1.1 | length 344.4
  Top Layer w10: U1.9@2603.3,-1213.39 2737.98,-1213.39 2798.07,-1153.3 X1.1@2798.07,-1131.79 2845.59,-1131.79 C96.1@2884.99,-1092.38
NetC97_1: C97.1 U1.23 X2.1 | length 398.3
  Top Layer w10: U1.23@2603.3,-937.8 2788.57,-937.8 2852.73,-873.65 X2.1@2872.73,-853.65 ; X2.1@2853.3,-874.22 2871.16,-874.22 C97.1@2924.99,-820.38
NetC98_1: C98.1 U1.24 X2.3 | length 420
  Top Layer w10: U1.24@2603.3,-918.11 2663.26,-918.11 2709.99,-871.38 2709.99,-786.38 2767.26,-729.12 X2.3@2787.26,-709.12 ; X2.3@2766.68,-728.55 2766.68,-705.69 C98.1@2820.99,-651.38
NetDS1_2: DS1.2 R90.2 | length 111.6
  Top Layer w10: DS1.2@1579.99,-411.38 1634.99,-411.38 R90.2@1674.99,-451.38
NetDS2_2: DS2.2 R33.2
  other v1: 629.99,-3300.08
NetDS3_2: DS3.2 R34.2
  other v1: 356.99,-3300.08
NetDS4_2: DS4.2 R102.2 | length 107.1
  Top Layer w10: DS4.2@1259.99,-1361.38 1359.99,-1361.38 R102.2@1364.99,-1356.38
NetDS5_2: DS5.2 R124.2
  other v1: 939.99,-3300.08
NetLED1_2: LED1.2 R58.2 | length 67
  Top Layer w10: R58.2@324.99,45.12 LED1.2@324.99,112.12
NetLED2_2: LED2.2 R59.2 | length 77
  Top Layer w10: R59.2@3295.46,115.59 LED2.2@3295.46,192.59
NetLED3_2: LED3.2 R60.2 | length 73.5
  Top Layer w10: R60.2@3646.49,-621.38 LED3.2@3719.99,-621.38
NetLED4_2: LED4.2 R61.2 | length 78.5
  Top Layer w10: LED4.2@484.99,-1376.38 R61.2@563.49,-1376.38
NetLED5_2: LED5.2 R89.2 | length 73.5
  Top Layer w10: R89.2@2414.99,93.62 LED5.2@2414.99,167.12
NetLS1_2: LS1.2 Q2.3 | length 718.4
  Top Layer w20: LS1.2@4499.99,-2496.38 4499.99,-2476.38 4509.99,-2476.38 4601.31,-2385.07 Q2.3@4601.31,-1825.82
NetQ1_1: Q1.1 R2.2 R3.1 | length 169.1
  Bottom Layer w10: Q1.1@-77.61,946.37 -77.61,896.22 -55.01,873.62 R2.2@31.99,873.62
NetQ1_1_2: Q1_1.2 U1_1.32 | length 358.2
  Top Layer w10: v1(559.99,128.62) 559.99,115.51 566.88,108.62 697.79,108.62 745.46,61.26 U1_1.32@745.46,-42.92
  Bottom Layer w10: v1(559.99,128.62) Q1_1.2@559.99,161.73
NetQ1_1_3: Q1_1.3 Q2_1.3 Q3_1.3 R6_1.2 U1_1.22 U1_1.38 | length 1568.1
  Top Layer w10: v1(509.99,98.62) 509.99,-76.38 553.3,-119.69 U1_1.38@609.64,-119.69 ; U1_1.22@940.35,-139.37 1047,-139.37 v1(1059.99,-126.38)
  Top Layer w40: R6_1.2@434.99,168.26 444.64,168.26 v3(509.99,233.62) v3(739.99,233.62) v3(969.99,233.62)
  Bottom Layer w10: v1(509.99,98.62) Q1_1.3@509.99,161.73 ; Q3_1.3@969.99,162 969.99,86.73 1059.99,-3.27 v1(1059.99,-126.38)
  Bottom Layer w40: Q1_1.3@509.99,161.73 v3@509.99,223.62 ; Q2_1.3@744.99,161.73 v3@744.99,227.91 ; Q3_1.3@969.99,162 v3(969.99,233.62)
NetQ1_1_4: Q1_1.4 U1_1.36 | length 343
  Top Layer w10: v1(609.99,23.62) 611.88,21.73 634.99,21.73 665.5,-8.78 U1_1.36@665.5,-42.92
  Bottom Layer w10: Q1_1.4@459.99,161.73 459.99,108.62 546.88,21.73 608.1,21.73 v1(609.99,23.62)
NetQ2_1: Q2.1 R6.2 R7.1 | length 164.7
  Top Layer w20: R7.1@4339.99,-1781.38 4347.02,-1788.41 Q2.1@4501.82,-1788.41
NetQ2_1_2: Q2_1.2 U1_1.29 | length 188.3
  Top Layer w10: v1(794.99,128.62) 819.99,103.62 819.99,67.69 804.52,52.22 U1_1.29@804.52,-42.92
NetQ2_1_4: Q2_1.4 U1_1.35 | length 246.7
  Top Layer w10: v1(639.99,83.62) 639.99,53.62 644.99,48.62 686.41,7.2 U1_1.35@686.41,-42.92
  Bottom Layer w10: v1(639.99,83.62) 639.99,98.62 694.99,153.62 Q2_1.4@694.99,161.73
NetQ3_1_2: Q3_1.2 U1_1.26 | length 303
  Top Layer w10: U1_1.26@863.57,-42.92 863.57,-2.8 950.1,83.73 1006.99,83.73 v1(1019.99,96.73)
  Bottom Layer w10: v1(1019.99,96.73) Q3_1.2@1019.99,162
NetQ3_1_4: Q3_1.4 U1_1.34 | length 440.1
  Top Layer w10: v1(677.49,83.62) 677.49,51.12 706.09,22.52 U1_1.34@706.09,-42.92
  Bottom Layer w10: v1(677.49,83.62) 695.25,101.37 904.99,101.37 919.99,116.37 Q3_1.4@919.99,162
NetQ6_2: Q6.2 U15.32 | length 340.5
  Top Layer w10: v1(3510.46,183.15) 3595.46,183.15 3685.62,92.99 ; 3685.62,92.67 3685.62,92.99 ; U15.32@3685.94,-1.5 3685.94,92.67 3685.62,92.99
  Bottom Layer w10: v1(3510.46,183.15) Q6.2@3510.46,216.26
NetQ6_3: Q6.3 Q7.3 Q8.3 R67.2 U15.22 U15.38 | length 1637.1
  Top Layer w10: v1(3460.46,158.15) 3460.46,-61.85 3476.88,-78.27 U15.38@3550.11,-78.27 ; U15.22@3880.82,-97.96 3994.36,-97.96 4005.46,-86.85 v1(4015.46,-86.85)
  Top Layer w40: R67.2@3389.99,198.26 3389.99,207.67 v3(3460.46,278.15) 3958.57,278.15 v3(3960.46,280.03)
  Bottom Layer w10: v1(3460.46,158.15) Q6.3@3460.46,216.26 ; Q8.3@3960.46,216.26 3960.46,153.15 4015.46,98.15 v1(4015.46,-86.85)
  Bottom Layer w40: Q6.3@3460.46,216.26 v3(3460.46,278.15) ; Q7.3@3710.46,216.26 v3(3710.46,280.03) ; Q8.3@3960.46,218.15 v3(3960.46,280.03)
NetQ6_4: Q6.4 U15.36 | length 322.7
  Top Layer w10: v1(3505.46,68.15) 3535.46,68.15 3605.11,-1.5 U15.36@3605.98,-1.5
  Bottom Layer w10: Q6.4@3410.46,216.26 3410.46,153.15 3495.46,68.15 v1(3505.46,68.15)
NetQ7_2: Q7.2 U15.29 | length 224.3
  Top Layer w10: 3744.68,43.15 3744.68,162.36 v1(3760.46,178.15) ; U15.29@3744.99,-1.5 3744.99,43.15
  Bottom Layer w10: v1(3760.46,178.15) Q7.2@3760.46,216.26
NetQ7_4: Q7.4 U15.35 | length 287
  Top Layer w10: v1(3575.46,118.15) 3575.46,94.25 3626.57,43.15 ; U15.35@3626.88,-1.5 3626.88,43.15
  Bottom Layer w10: v1(3575.46,118.15) 3575.46,153.15 3638.57,216.26 Q7.4@3660.46,216.26
NetQ8_2: Q8.2 U15.26 | length 356
  Top Layer w10: U15.26@3804.05,-1.5 3804.05,41.73 3920.46,158.15 v1(4010.46,158.15)
  Bottom Layer w10: v1(4010.46,158.15) Q8.2@4010.46,216.26
NetQ8_4: Q8.4 U15.34 | length 506.8
  Top Layer w10: v1(3610.46,111.43) 3610.46,89.25 3646.57,53.15 U15.34@3646.57,-1.5
  Bottom Layer w10: v1(3610.46,111.43) 3657.18,158.15 3740.46,158.15 3770.46,128.15 3840.46,128.15 3910.46,198.15 Q8.4@3910.46,216.26
NetQ9_2: Q9.2 U17.32 | length 290.1
  Top Layer w10: U17.32@3630.35,-961.85 3699.52,-961.85 ; 3699.52,-961.54 3710.19,-961.54 3774.99,-896.74 3774.99,-876.38 3794.99,-856.38 v1(3794.99,-786.38)
NetQ9_3: Q9.3 Q10.3 Q11.3 R73.2 U17.22 U17.38 | length 1614.9
  Top Layer w10: U17.22@3533.89,-1156.74 3533.89,-1205.28 3533.89,-1265.28 v1(3574.99,-1306.38) ; U17.38@3553.57,-826.03 3553.57,-776.38 3563.57,-766.38 v1(3729.99,-766.38)
  Top Layer w40: R73.2@3779.99,-701.38 3784.99,-696.38 3854.99,-696.38 v3(3889.99,-731.38) v3(3889.99,-988.88) v3(3889.99,-1246.38)
  Bottom Layer w10: v1(3574.99,-1306.38) 3644.99,-1306.38 3704.99,-1246.38 Q11.3@3827.87,-1246.38 ; v1(3729.99,-766.38) 3744.99,-766.38 3779.99,-731.38 Q9.3@3827.87,-731.38
  Bottom Layer w40: Q11.3@3827.87,-1246.38 v3(3889.99,-1246.38) ; Q10.3@3827.87,-988.88 v3(3889.99,-988.88) ; Q9.3@3827.87,-731.38 v3(3889.99,-731.38)
NetQ9_4: Q9.4 U17.36 | length 320.4
  Top Layer w10: U17.36@3630.35,-883.11 3634.99,-878.47 v1(3634.99,-841.38)
  Bottom Layer w10: v1(3634.99,-841.38) 3634.99,-811.38 3764.99,-681.38 Q9.4@3827.87,-681.38
NetQ10_2: Q10.2 U17.29 | length 172.1
  Top Layer w10: U17.29@3630.35,-1020.91 3749.52,-1020.91 3767.49,-1038.88 v1(3794.99,-1038.88)
NetQ10_4: Q10.4 U17.35 | length 238.5
  Top Layer w10: U17.35@3630.35,-902.8 3673.57,-902.8 v1(3704.99,-871.38)
  Bottom Layer w10: v1(3704.99,-871.38) 3744.99,-871.38 3812.49,-938.88 Q10.4@3827.87,-938.88
NetQ11_2: Q11.2 U17.26 | length 362.5
  Top Layer w10: U17.26@3630.35,-1079.97 3673.57,-1079.97 3754.99,-1161.38 3754.99,-1281.38 v1(3769.99,-1296.38)
  Bottom Layer w10: v1@3764.99,-1296.38 v1(3769.99,-1296.38) Q11.2@3827.87,-1296.38
NetQ11_4: Q11.4 U17.34 | length 481.3
  Top Layer w10: U17.34@3630.35,-922.48 3678.89,-922.48 3697.49,-903.88 3697.49,-902.92 3699.03,-901.38 v1(3734.99,-901.38)
  Bottom Layer w10: v1(3734.99,-901.38) 3769.99,-936.38 3769.99,-1196.38 Q11.4@3827.87,-1196.38
NetQ12_2: Q12.2 U20.32 | length 281.6
  Top Layer w10: v1(529.99,-1156.38) 536.99,-1149.38 536.99,-1054.38 545.15,-1046.22 599.99,-1046.22 ; 599.99,-1045.91 U20.32@710.27,-1045.91
NetQ12_3: Q12.3 Q13.3 Q14.3 R79.2 U20.22 U20.38 | length 1629.7
  Top Layer w10: v1(549.99,-1206.38) 569.99,-1206.38 604.99,-1241.38 774.99,-1241.38 787.04,-1229.34 U20.38@787.04,-1181.74 ; v1(799.99,-706.38) 804.94,-711.33 804.94,-849.25 U20.22@806.72,-851.03
  Top Layer w40: v3(429.99,-721.38) v3(429.99,-963.88) v3(429.99,-1206.38) 429.99,-1256.38 469.99,-1296.38 R79.2@495.35,-1296.38
  Bottom Layer w10: Q12.3@494.99,-1206.38 v1(549.99,-1206.38) ; Q14.3@494.99,-721.38 569.99,-721.38 584.99,-706.38 v1(799.99,-706.38)
  Bottom Layer w40: v3(429.99,-1206.38) Q12.3@494.99,-1206.38 ; v3(429.99,-963.88) Q13.3@494.99,-963.88 ; v3(429.99,-721.38) Q14.3@494.99,-721.38
NetQ12_4: Q12.4 U20.36 | length 299.1
  Top Layer w10: v1(641.99,-1204.38) 641.99,-1154.38 671.72,-1124.65 U20.36@710.27,-1124.65
  Bottom Layer w10: Q12.4@494.99,-1256.38 549.99,-1256.38 601.99,-1204.38 v1(641.99,-1204.38)
NetQ13_2: Q13.2 U20.29 | length 216.8
  Top Layer w10: v1(523.74,-913.88) 542.49,-913.88 615.46,-986.85 U20.29@710.27,-986.85
NetQ13_4: Q13.4 U20.35 | length 268.5
  Top Layer w10: v1(574.99,-1101.38) 591.99,-1118.38 647.99,-1118.38 661.41,-1104.97 U20.35@710.27,-1104.97
  Bottom Layer w10: Q13.4@494.99,-1013.88 574.99,-1093.88 v1(574.99,-1101.38)
NetQ14_2: Q14.2 U20.26 | length 400.6
  Top Layer w10: v1(549.99,-671.38) 574.99,-696.38 574.99,-831.38 671.41,-927.8 U20.26@710.27,-927.8
  Bottom Layer w10: Q14.2@494.99,-671.38 v1(549.99,-671.38)
NetQ14_4: Q14.4 U20.34 | length 510.9
  Top Layer w10: v1(589.99,-1071.38) 598.88,-1071.38 620.88,-1093.38 621.03,-1093.38 629.03,-1101.38 640.95,-1101.38 657.05,-1085.28 U20.34@710.27,-1085.28
  Bottom Layer w10: Q14.4@494.99,-771.38 549.99,-771.38 559.99,-781.38 559.99,-1041.38 v1(589.99,-1071.38)
NetQ15_2: Q15.2 U22.32 | length 313.3
  Top Layer w10: v1(2639.99,135.12) 2644.99,130.12 2679.99,130.12 2735.46,74.65 2775.46,74.65 2795.46,54.65 U22.32@2795.46,-31.42
  Bottom Layer w10: v1(2639.99,135.12) Q15.2@2639.99,173.5
NetQ15_3: Q15.3 Q16.3 Q17.3 R85.2 U22.22 U22.38 | length 1588.9
  Top Layer w10: v1(2589.99,115.12) 2589.99,-94.88 2603.3,-108.19 U22.38@2659.64,-108.19 ; U22.22@2990.35,-127.87 3112,-127.87 3124.99,-114.88 v1(3124.99,-64.88)
  Top Layer w40: R85.2@2519.99,163.62 2589.99,233.62 v3(2589.99,240.12) v3(2837.49,240.12) v3(3084.99,240.12)
  Bottom Layer w10: v1(2589.99,115.12) Q15.3@2589.99,173.5 ; Q17.3@3084.99,173.5 3084.99,60.12 3124.99,20.12 v1(3124.99,-64.88)
  Bottom Layer w40: Q15.3@2589.99,173.5 v3(2589.99,240.12) ; Q16.3@2837.49,173.5 v3(2837.49,240.12) ; Q17.3@3084.99,173.5 v3(3084.99,240.12)
NetQ15_4: Q15.4 U22.36 | length 329.7
  Top Layer w10: v1(2624.99,-29.88) 2646.02,-29.88 2647.55,-31.42 U22.36@2715.5,-31.42
  Bottom Layer w10: Q15.4@2539.99,173.5 2539.99,55.12 v1(2624.99,-29.88)
NetQ16_2: Q16.2 U22.29 | length 181.2
  Top Layer w10: U22.29@2854.52,-31.42 2854.52,68.53 2889.99,104.01 v1(2889.99,135.12)
NetQ16_4: Q16.4 U22.35 | length 325.2
  Top Layer w10: v1(2659.99,40.12) 2682.13,17.98 2724.14,17.98 2734.63,7.5 2734.63,-20.78 2736.41,-22.56 U22.35@2736.41,-31.42
  Bottom Layer w10: v1(2659.99,40.12) 2659.99,65.12 2768.38,173.5 Q16.4@2787.49,173.5
NetQ17_2: Q17.2 U22.26 | length 364.8
  Top Layer w10: U22.26@2913.57,-31.42 2913.57,10.12 2913.73,10.12 2988.73,85.12 3104.99,85.12 v1(3134.99,115.12)
  Bottom Layer w10: v1(3134.99,115.12) Q17.2@3134.99,173.5
NetQ17_4: Q17.4 U22.34 | length 503.2
  Top Layer w10: v1(2699.99,55.12) 2713.89,55.12 2753.89,15.12 2756.09,15.12 U22.34@2756.09,-31.42
  Bottom Layer w10: v1(2699.99,55.12) 2754.99,110.12 2971.61,110.12 Q17.4@3034.99,173.5
NetR2_1_1: R2_1.1 U1_1.20 | length 442.1
  Top Layer w10: U1_1.20@940.35,-178.74 992.63,-178.74 v1(1004.99,-166.38)
  Bottom Layer w10: R2_1.1@741.66,-294.88 741.66,-264.72 749.99,-256.38 979.99,-256.38 1004.99,-231.38 v1(1004.99,-166.38)
NetR3_1_2: R3_1.2 U1_1.18 | length 109.9
  Top Layer w10: U1_1.18@940.35,-218.11 1044.26,-218.11 R3_1.2@1048.49,-213.88
NetR4_1_1: R4_1.1 R5_1.2 U1_1.23 | length 500.7
  Top Layer w10: U1_1.23@940.35,-119.69 1016.68,-119.69 v1(1029.99,-106.38)
  Bottom Layer w10: R4_1.1@803.33,-294.88 R5_1.2@864.99,-294.88 1006.49,-294.88 1034.99,-266.38 1034.99,-111.38 v1(1029.99,-106.38)
NetR23_2: R23.2 U2.2 | length 81.5
  Top Layer w10: U2.2@3050.99,-1841.22 3089.83,-1841.22 v1(3119.99,-1871.38)
NetR24_2: R24.2 U2.3 | length 140.4
  Top Layer w10: U2.3@3050.99,-1866.82 3080.43,-1866.82 3119.99,-1906.38 v1(3119.99,-1961.38)
NetR25_2: R25.2 U2.4 | length 2181.5
  Top Layer w10: R25.2@1279.99,-2847.08 1279.99,-2821.38 1314.99,-2786.38 1560.95,-2786.38 1631.95,-2715.38 2038.87,-2715.38 2183.87,-2570.38 2330.99,-2570.38 3008.97,-1892.41 U2.4@3050.99,-1892.41
NetR26_2: R26.2 U2.5 | length 2055.8
  Top Layer w10: R26.2@1379.99,-2847.08 1524.29,-2847.08 1638.99,-2732.38 2045.91,-2732.38 2190.91,-2587.38 2338.99,-2587.38 3008.38,-1918 U2.5@3050.99,-1918
NetR27_2: R27.2 U2.6 | length 1806.5
  Top Layer w10: R27.2@1624.99,-2847.08 1624.99,-2836.38 1711.99,-2749.38 2052.95,-2749.38 2197.95,-2604.38 2346.99,-2604.38 3007.79,-1943.59 U2.6@3050.99,-1943.59